# Altium PCB FACE_ENCODER_v1.0.PcbDoc
Units mm, origin at the board's own origin, x right, y up, seen from the top; angles counter-clockwise.
Board outline 49.8 x 49.8 mm, 2 copper layers (Top Layer, Bottom Layer); 17 components, 70 nets, 135 pads, 29 vias.
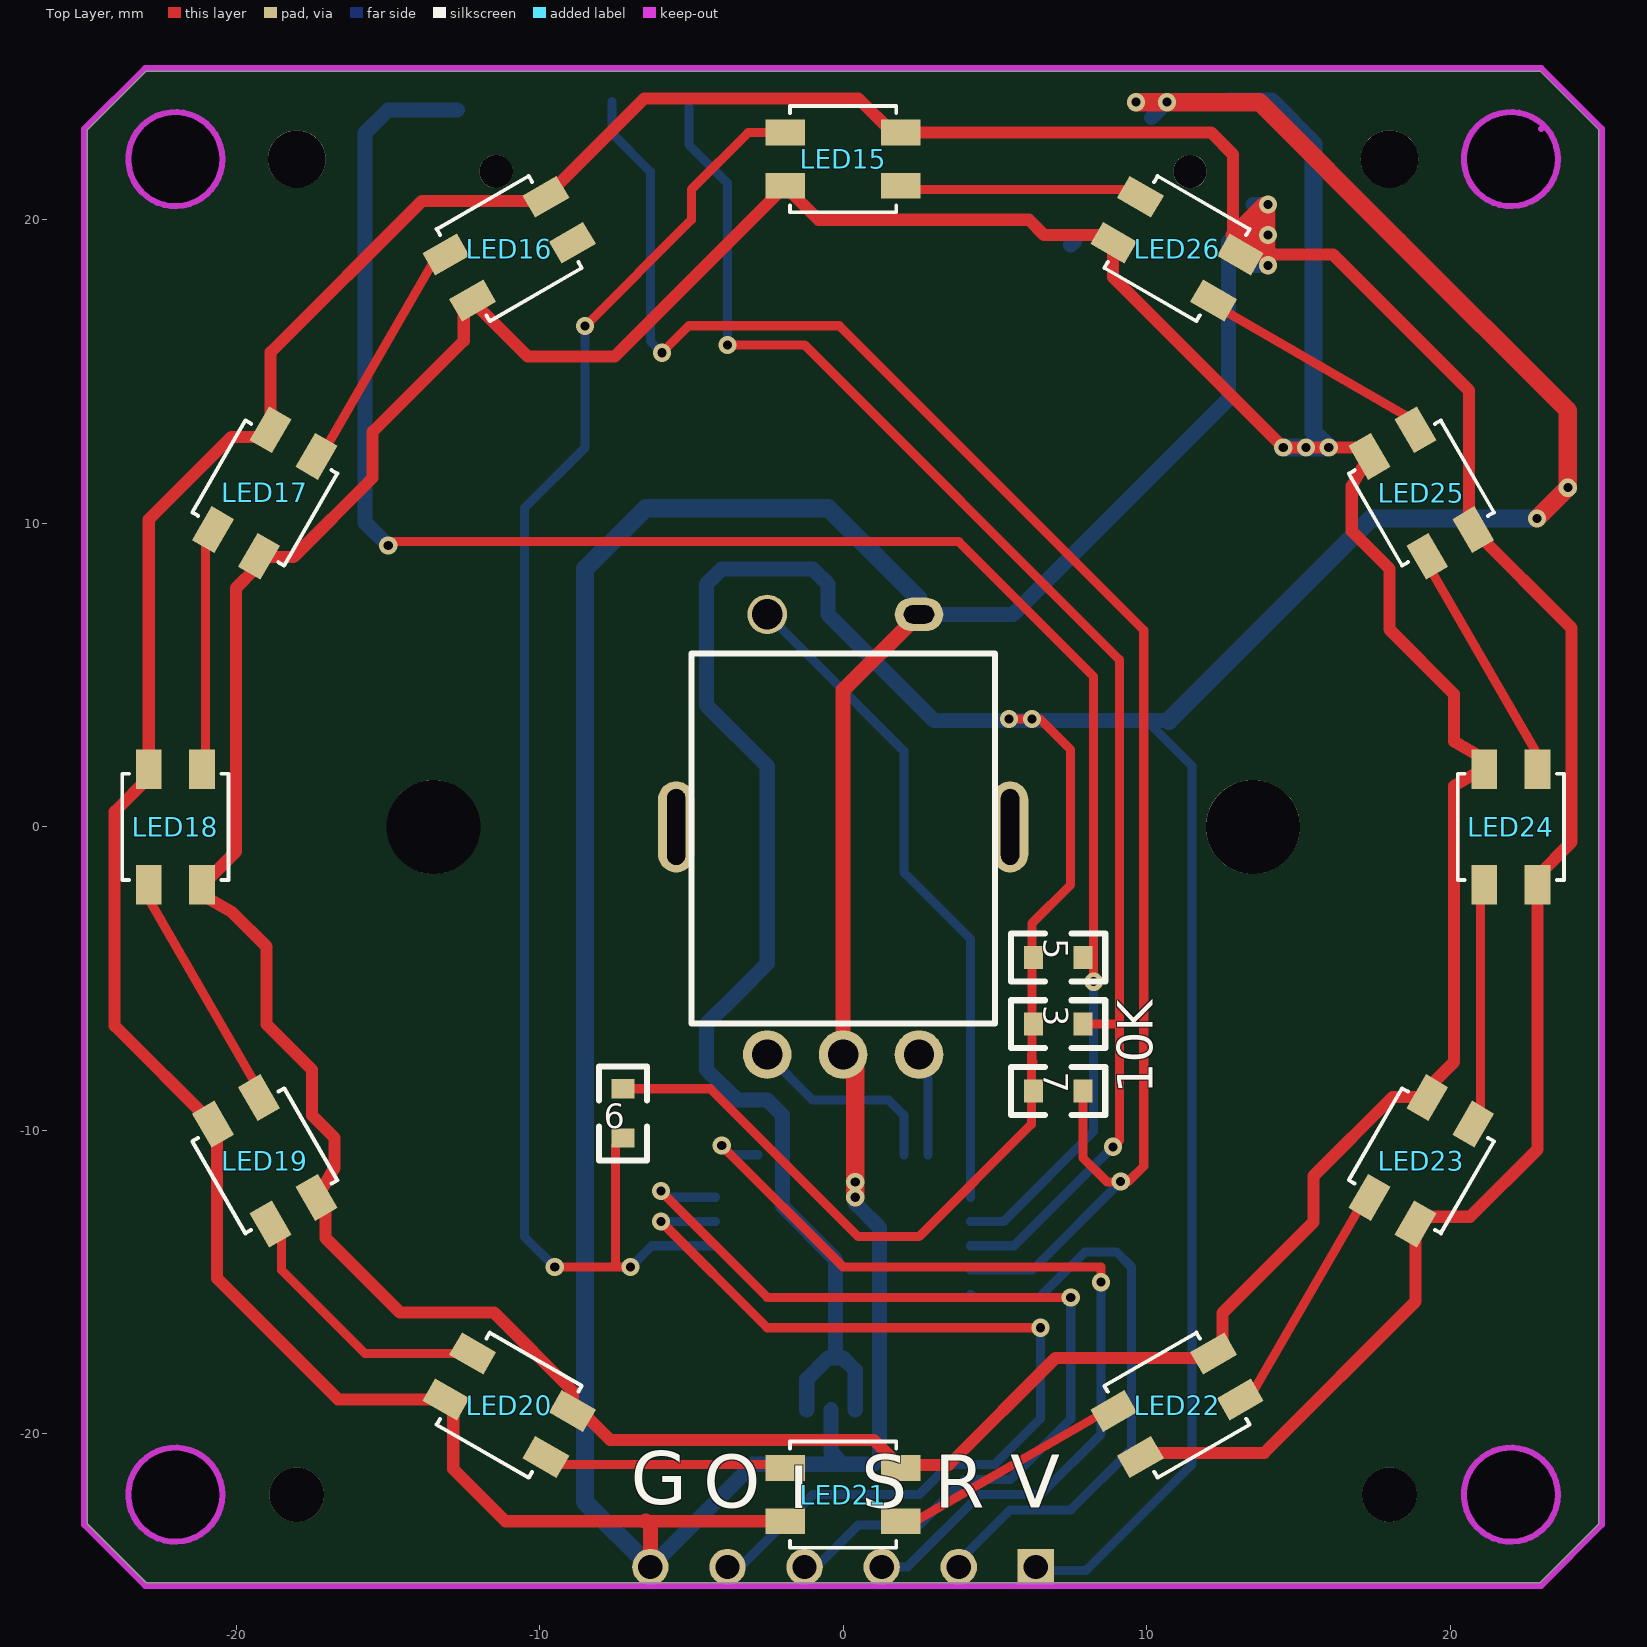
[diagram p0: Top Layer view]
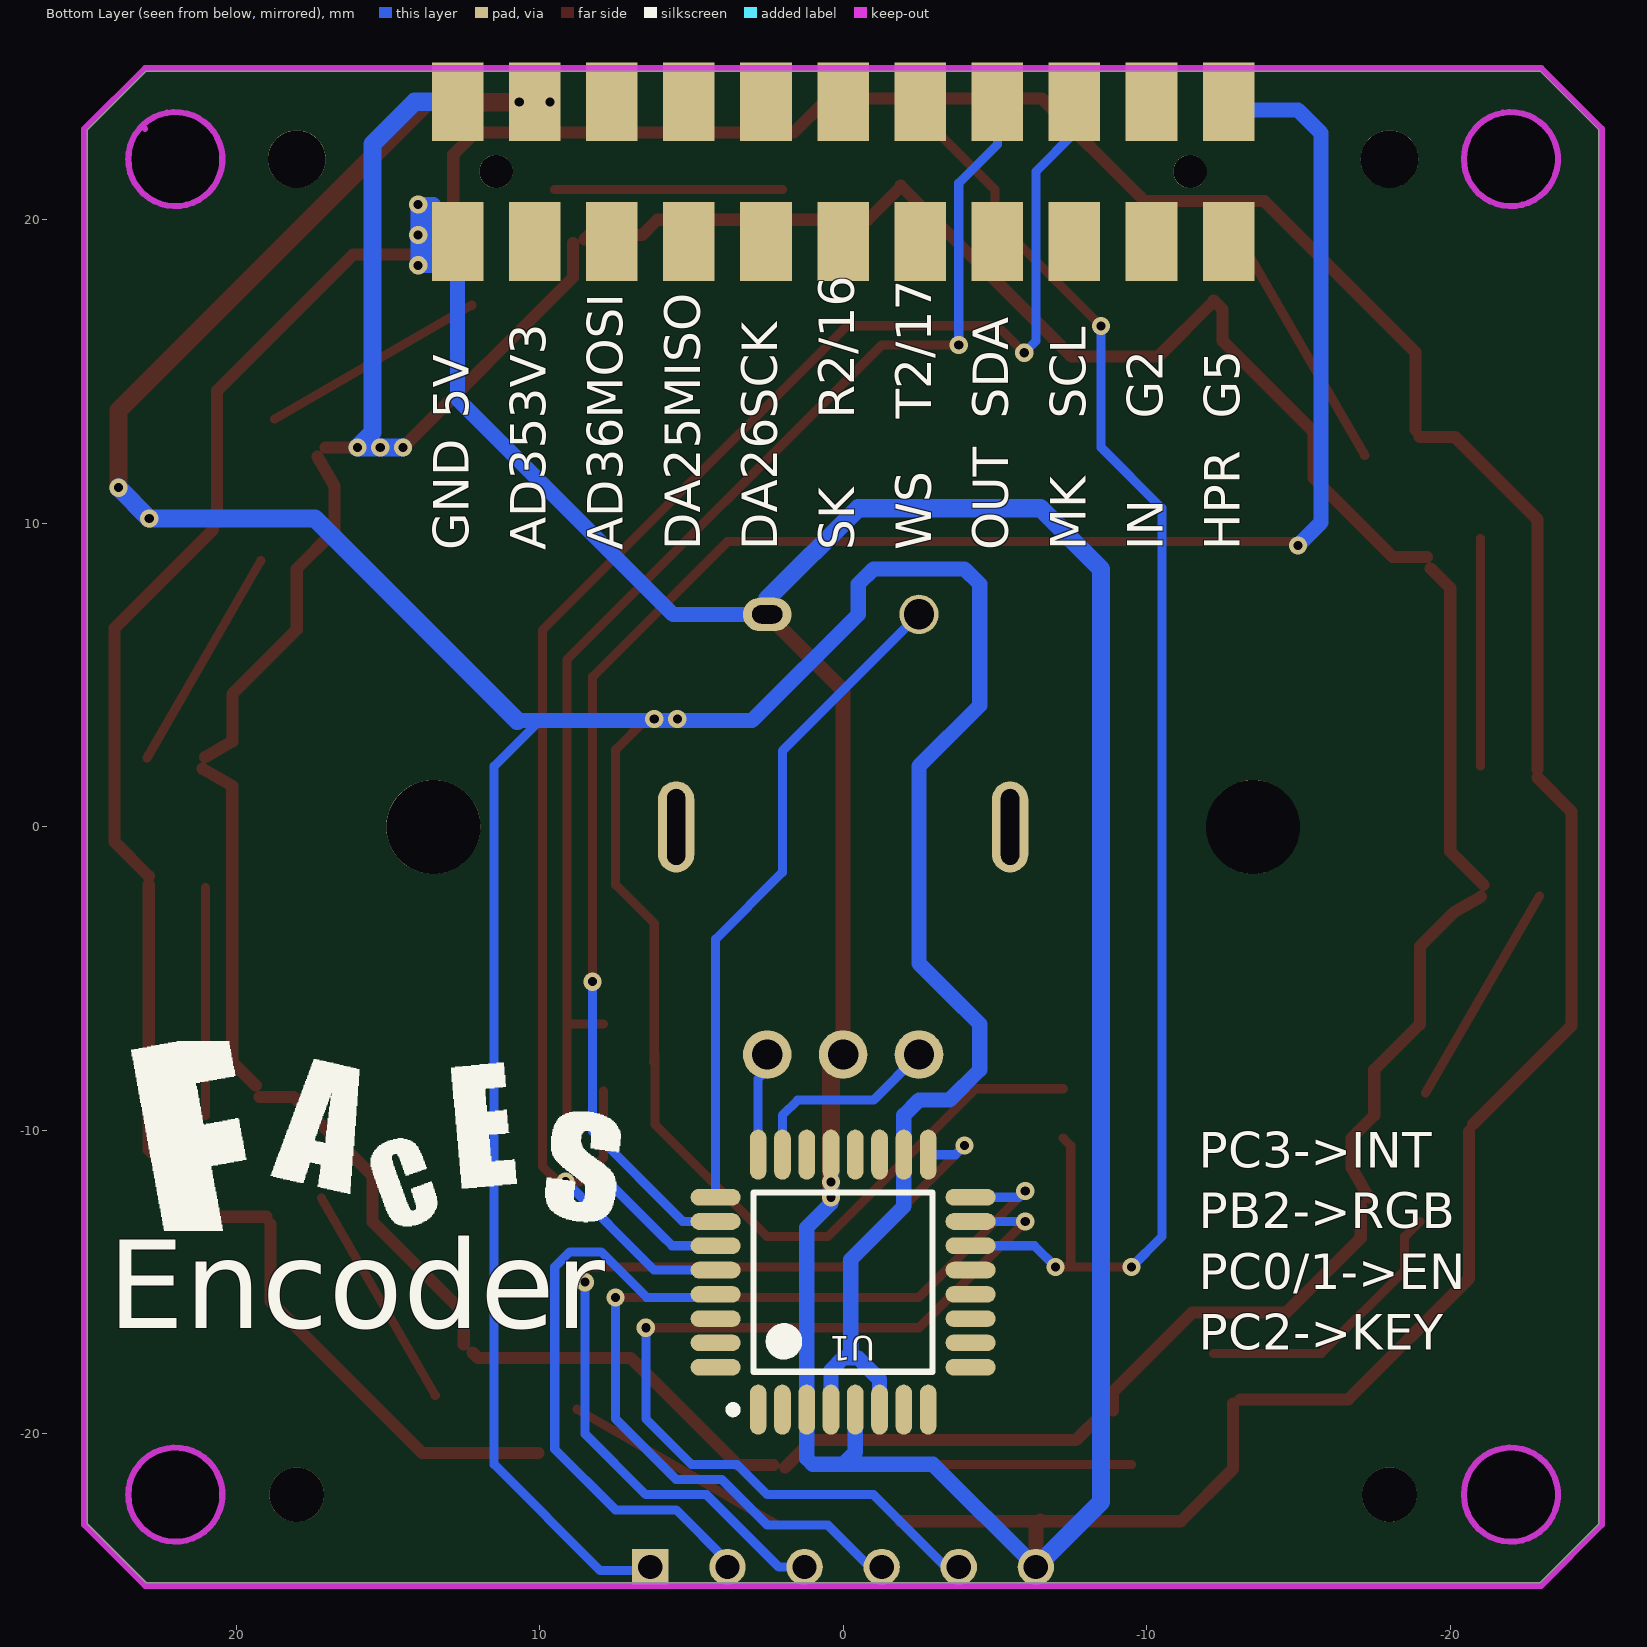
[diagram p1: Bottom Layer view, seen from below]

## Layer stack, top to bottom
Top Layer: signal copper 0.0356
Dielectric: dielectric 0.32, FR-4, Dk 4.8
Bottom Layer: signal copper 0.0356

## Board outline
-22.958,-24.9 -24.9,-22.958 -24.9,22.958 -22.958,24.9 11.5,24.9 cw(c11.5,25) 11.498,24.9 11.5,24.9 22.958,24.9 24.9,22.958 24.9,-22.958 22.958,-24.9

## Design rules (kind name [scope] priority, off if disabled: settings)
Clearance [All] p1: gap=0.152
PlaneConnect [All] p1: planeconnectstyle=Direct reliefexpansion=0.508 reliefentries=4 reliefconductorwidth=0.254 reliefairgap=0.254
PolygonConnect [All] p1: connectstyle=Direct reliefconductorwidth=0.254 reliefentries=4 polygonreliefangle="90 Angle" airgapwidth=0.254
RoutingVias [All] p1: holewidth=0.4 width=0.7 viastyle="Through Hole" minholewidth=0.2 minwidth=0.4 maxholewidth=1 maxwidth=1.2
SilkToSolderMaskClearance SilkscreenOverComponentPads [IsPad] p1: minsilkscreentomaskgap=0.254 clearancetoexposedcopper=TRUE
SolderMaskExpansion [All] p1: expansion=0.102
Width [All] p1: maxlimit=2.54 minlimit=0.152 preferedwidth=0.152 minimp=50.000000 maximp=50.000000 favimp=50.000000
26 further rules are at their usual default settings.

## Classes and differential pairs
component class M5TopDualU: *6 *7 *8 *9 BEEP1 C10

## Components (designator, comment, footprint, x,y, rotation, side; value= is the part's Value field where it differs from the comment)
3 "10K" R0603 7.9,-6.5 r180 top (schematic designator R4)
5 "10K" R0603 7.9,-4.3 r180 top (schematic designator R4)
6 "10K" R0603 -7.253,-8.626 r270 top (schematic designator R4)
7 "10K" R0603 7.9,-8.7 r180 top (schematic designator R4)
LED15 "SK6812" SK6812-3535 0,22 r180 top (schematic designator LED5)
LED16 "SK6812" SK6812-3535 -11,19.053 r210 top (schematic designator LED5)
LED17 "SK6812" SK6812-3535 -19.053,11 r240 top (schematic designator LED5)
LED18 "SK6812" SK6812-3535 -22,0 r270 top (schematic designator LED5)
LED19 "SK6812" SK6812-3535 -19.053,-11 r300 top (schematic designator LED5)
LED20 "SK6812" SK6812-3535 -11,-19.053 r330 top (schematic designator LED5)
LED21 "SK6812" SK6812-3535 0,-22 r0 top (schematic designator LED5)
LED22 "SK6812" SK6812-3535 11,-19.053 r30 top (schematic designator LED5)
LED23 "SK6812" SK6812-3535 19.053,-11 r60 top (schematic designator LED5)
LED24 "SK6812" SK6812-3535 22,0 r90 top (schematic designator LED5)
LED25 "SK6812" SK6812-3535 19.053,11 r120 top (schematic designator LED5)
LED26 "SK6812" SK6812-3535 11,19.053 r150 top (schematic designator LED5)
U1 "ATmega8-16AC" 32A_N 0,-15 r90 bottom

## Footprints (in the part's own frame and the unit in brackets; to place one, negate y for a bottom-side part, rotate by r counter-clockwise, add the part's x,y. Pads: shape width x height; smd on the part's side, far side on the other; paste and mask are expansions set on the pad)
32A_N [mm] "Thin QFP, 32-Leads, Body 7x7mm, Pitch 0.8mm, IPC Medium Density"
  oval 1.65x0.55 smd: 1(-4.2,2.8) 2(-4.2,2) 3(-4.2,1.2) 4(-4.2,0.4) 5(-4.2,-0.4) 6(-4.2,-1.2) 7(-4.2,-2) 8(-4.2,-2.8) 17(4.2,-2.8) 18(4.2,-2) 19(4.2,-1.2) 20(4.2,-0.4) 21(4.2,0.4) 22(4.2,1.2) 23(4.2,2) 24(4.2,2.8)
  oval 0.55x1.65 smd: 9(-2.8,-4.2) 10(-2,-4.2) 11(-1.2,-4.2) 12(-0.4,-4.2) 13(0.4,-4.2) 14(1.2,-4.2) 15(2,-4.2) 16(2.8,-4.2) 25(2.8,4.2) 26(2,4.2) 27(1.2,4.2) 28(0.4,4.2) 29(-0.4,4.2) 30(-1.2,4.2) 31(-2,4.2) 32(-2.8,4.2)
  silkscreen extent -4.32,-2.95 2.95,3.75, body extent -3.5,-3.5 3.5,3.5, height 1.2
R0603 [mil] "电阻0603"
  rect 25x30 smd: 1(0,0) 2(64,0)
  silkscreen extent -29,-31 93,31
SK6812-3535 [mm]
  rect 1.3x0.85 smd: 1(-1.9,0.875) 2(-1.9,-0.875) 3(1.9,-0.875) 4(1.9,0.875)
  silkscreen extent -1.75,-1.75 1.75,1.75, body extent -1.75,-1.75 1.75,1.75, height 0.65

## Part data
3 5 6 7: library part RES2
U1: "8-Bit AVR Microcontroller with 8K Bytes of In-System Programmable Flash Memory"

## Free pads (board coordinates)
  round 3.1 hole 3.1: 0(-22,-22) 0(-22,22) 0(13.5,0) 0(22,-22) 0(22,22)
  round 1.8 hole 1.8: 0(-18,-22) 0(18,-22)
  round 1.9 hole 1.9: 0(-18,22) 0(18,22)
  oval 3x3.1 hole 3.1: 0(-13.5,0)
  round 1.1 hole 1.1: 0(-11.43,21.59) 0(11.43,21.59)
  round 1.2 hole 0.8: 0(-6.35,-24.384) 0(-3.81,-24.384) 0(-1.27,-24.384) 0(1.27,-24.384) 0(3.81,-24.384)
  oval 1.2x3 hole 0.6 slot 2.5 at 90 deg: 0(-5.5,0) 0(5.5,0)
  round 1.6 hole 1: 0(-2.5,-7.5) 0(0,-7.5) 0(2.5,-7.5)
  round 1.3 hole 1: 0(-2.5,7)
  oval 1.6x1.1 hole 0.6 slot 1 at 0 deg: 0(2.5,7)
  rect 1.2x1.2 hole 0.8: 0(6.35,-24.384)
  rect 1.7x2.6 smd far side: 29(-12.7,19.29) 29(-12.7,23.89) 29(-10.16,23.89) 29(-10.16,19.29) 29(-7.62,19.29) 29(-7.62,23.89) 29(-5.08,19.29) 29(-5.08,23.89) 29(-2.54,19.29) 29(-2.54,23.89) 29(0,19.29) 29(0,23.89) 29(2.54,19.29) 29(2.54,23.89) 29(5.08,19.29) 29(5.08,23.89) 29(7.62,19.29) 29(7.62,23.89) 29(10.16,19.29) 29(10.16,23.89) 29(12.7,19.29) 29(12.7,23.89)

## Via types
v1: diameter 0.6, hole 0.3, Top Layer to Bottom Layer, tented both sides, 29 vias

## Nets (pads, with @x,y where several pads share a name; then routed paths per layer and width w, separated by ;. In a path a pad name is that pad's centre, name@x,y a point inside that pad or via, vN(x,y) a via of type N, cw(c..) or ccw(c..) an arc to the next point about the centre after c; other vN are vias at no path point)
8266RST: 
+3.3V: 
+5V: 
A0: 
A1: 
A2: 
A3: 
A4: 
A5: 
AREF: 
BEEP: 
D0/RX: 
D1/TX: 
D2: 
D3: 
D4: 
D5: 
D6: 
D7: 
D+: 
D-: 
ESP_LOAD: 
GND: 
IO8: 
IO9: 
IO10: 
IO11: 
IO12: 
IO13: 
K2: 
KEYA: 
KEYAD: 
KEYC: 
LCDCS: 
LCDLED: 
LCDRS: 
LCDRST: 
LCDSCK: 
LCDSDA: 
MISO: 
MOSI: 
Net*1_6: 
Net*1_16: 
Net*1_17: 
Net*1_24: 
Net*1_33: 
Net*2_2: 
Net*2_3: 
Net*_8: 
Net*_9: 
Net*_10: 
Net*_11: 
Net*_12: 
Net*_13: 
Net*_14: 
NetBEEP1_2: 
NetESP-1_3: 
NetESP-1_15: 
NetESP-1_16: 
NetLED1_1: 
NetQ1_2: 
NetQ2_2: 
NetR2_1: 
NetR3_1: 
NetR9_2: 
NetR10_2: 
RST: 
SCK: 
SS: 
VUSB: 
pads on no net: 3.1 3.2 5.1 5.2 6.1 6.2 7.1 7.2 LED15.1 LED15.2 LED15.3 LED15.4 LED16.1 LED16.2 LED16.3 LED16.4 LED17.1 LED17.2 LED17.3 LED17.4 LED18.1 LED18.2 LED18.3 LED18.4 LED19.1 LED19.2 LED19.3 LED19.4 LED20.1 LED20.2 LED20.3 LED20.4 LED21.1 LED21.2 LED21.3 LED21.4 LED22.1 LED22.2 LED22.3 LED22.4 LED23.1 LED23.2 LED23.3 LED23.4 LED24.1 LED24.2 LED24.3 LED24.4 LED25.1 LED25.2 LED25.3 LED25.4 LED26.1 LED26.2 LED26.3 LED26.4 U1.1 U1.2 U1.3 U1.4 U1.5 U1.6 U1.7 U1.8 U1.9 U1.10 U1.11 U1.12 U1.13 U1.14 U1.15 U1.16 U1.17 U1.18 U1.19 U1.20 U1.21 U1.22 U1.23 U1.24 U1.25 U1.26 U1.27 U1.28 U1.29 U1.30 U1.31 U1.32
copper on no net: | length 1031.2
  Top Layer w0.3: -22.937,-2.273 -19.187,-8.768 ; -21,2 -21,9.5 ; -19,-13 -18.5,-13.5 -18.5,-14.6 -15.755,-17.345 -12.208,-17.345 ; -17.187,12.232 -13.437,18.727 ; v1(-14.986,9.271) -14.859,9.398 3.81,9.398 8.255,4.953 v1(8.255,-5.1) ; -9.5,-21 -2,-21 ; v1(-9.5,-14.5) v1(-7,-14.5) ; v1(-8.5,16.5) -5,20 -5,21 -3.125,22.875 -1.9,22.875 ; -7.5,-14.5 -7.5,-10.499 -7.253,-10.252 ; -7.253,-8.626 -4.374,-8.626 0.5,-13.5 2.5,-13.5 6.2,-9.8 6.2,-7.5 ; v1(-6,-13) -2.5,-16.5 v1(6.5,-16.5) ; v1(-6,-12) -2.5,-15.5 v1(7.5,-15.5) ; v1(-5.969,15.621) -5.08,16.51 -0.127,16.51 0,16.383 9.906,6.477 9.906,-11.176 9.398,-11.684 v1(9.144,-11.684) 9.128,-11.7 8.7,-11.7 7.9,-10.9 7.9,-8.7 ; v1(-4,-10.5) 0,-14.5 8.5,-14.5 v1(8.5,-15) ; v1(-3.81,15.875) -1.27,15.875 9.1,5.505 9.1,-10.331 v1(8.89,-10.541) ; 2,21 9.5,21 ; 2.273,-22.937 8.768,-19.187 ; 3.8,-24 4,-24.2 ; v1(5.461,3.556) v1(6.223,3.556) 6.477,3.556 7.493,2.54 7.493,-1.907 6.223,-3.177 6.223,-7.722 6.248,-7.747 ; 7.9,-6.5 9.1,-6.5 ; 12.232,17.187 18.727,13.437 ; 13.437,-18.727 17.187,-12.232 ; 19.187,8.768 22.937,2.273 ; 21,-9.5 21,-2
  Top Layer w0.4: -22.875,1.625 -24,0.5 -24,-6.552 -20.76,-9.792 ; -22.875,1.9 -22.875,10.125 -20.155,12.845 -18.998,12.845 ; -21.102,-1.913 -20,-0.811 -20,7.148 -20,7.87 -19.352,8.518 ; -21.018,-2.299 -20.121,-2.817 -19,-3.938 -19,-6.5 -17.5,-8 -17.5,-9.5 -16.756,-10.244 -16.756,-11.233 -17.318,-12.208 ; -20.623,-10.03 -20.623,-14.877 -16.64,-18.86 -13.083,-18.86 ; -19.232,8.894 -18.106,8.894 -15.5,11.5 -15.5,13.017 -12.5,16.017 -12.5,17.053 -12.208,17.345 ; -18.86,13.083 -18.86,15.64 -13.877,20.623 -10.03,20.623 ; -17.053,-12.5 -17.053,-13.547 -14.6,-16 -11.5,-16 -8.894,-18.606 -8.894,-19.232 ; -12.845,-18.998 -12.845,-21.155 -11.125,-22.875 -1.9,-22.875 ; -12.208,17.318 -10.39,15.5 -7.525,15.5 -1.9,21.125 ; -9.792,20.76 -6.552,24 0.5,24 1.625,22.875 1.9,22.875 12.125,22.875 12.845,22.155 12.845,18.998 ; -8.518,-19.352 -7.67,-20.2 1.011,-20.2 1.913,-21.102 ; -1.913,21.102 -0.811,20 6.121,20 6.621,19.5 8.37,19.5 8.518,19.352 ; 2.299,-21.018 3.482,-21.018 7,-17.5 12.026,-17.5 12.208,-17.318 ; 8.894,19.232 8.894,18.106 v1(14.5,12.5) 16.017,12.5 17.053,12.5 ; 10.03,-20.623 13.877,-20.623 18.86,-15.64 18.86,-13.083 ; 12.5,-17.053 12.5,-16.017 15.5,-13.017 15.5,-11.5 18.106,-8.894 19.232,-8.894 ; 13.083,18.86 16.14,18.86 20.623,14.377 20.623,10.03 ; 17.318,12.208 16.756,11.233 16.756,9.744 18,8.5 18,6.5 20.121,4.379 20.121,2.817 21.018,2.299 ; 18.998,-12.845 20.655,-12.845 22.875,-10.625 22.875,-1.9 ; 19.352,-8.518 20.127,-7.743 20.127,-6.627 20.127,1.35 21.102,1.913 ; 20.76,9.792 24,6.552 24,-0.5 22.875,-1.625
  Top Layer w0.5: -6.5,-22.875 -6.35,-23.025 -6.35,-24.384 ; 0,-7.5 0,4.5 2.5,7 ; 12.845,19.5 13.845,20.5 v1(14,20.5) ; 13,19 14,20 v1(14,20.5) ; 13.5,19 v1(14,19.5) ; v1(14,18.5) v1(14,20.5)
  Top Layer w0.6: 0,-7.5 0.4,-7.9 v1(0.4,-12.2) ; v1(9.652,23.876) 13.716,23.876 18.288,19.304 23.876,13.716 v1(23.876,11.176) v1(22.86,10.16)
  Bottom Layer w0.3: v1(-9.5,-14.5) -10.5,-13.5 -10.5,10.5 -8.5,12.5 v1(-8.5,16.5) ; -7.62,23.89 -7.62,22.86 -6.35,21.59 -6.35,16.002 v1(-5.969,15.621) ; v1(-7,-14.5) -6.3,-13.8 -4.2,-13.8 ; v1(-6,-13) -4.2,-13 ; v1(-6,-12) -5.8,-12.2 -4.2,-12.2 ; -5.08,23.89 -5.08,22.479 -3.81,21.209 v1(-3.81,15.875) ; v1(-4,-10.5) -3.7,-10.8 -2.8,-10.8 ; -3.81,-24.384 -3.384,-24.384 -1,-22 2.5,-22 3.5,-21 5,-21 6.5,-19.5 v1(6.5,-16.5) ; -2.5,-7.5 -1,-9 1.5,-9 2,-9.5 2,-10.8 ; -2.5,7 2,2.5 2,-1.5 4.2,-3.7 4.2,-12.2 ; -1.27,-24.384 -0.884,-24.384 0.5,-23 2.5,-23 4,-21.5 5.5,-21.5 7.5,-19.5 v1(7.5,-15.5) ; 1.27,-24.384 2.116,-24.384 4.5,-22 6.5,-22 8.5,-20 v1(8.5,-15) ; 2.5,-8 2.8,-8.3 2.8,-10.8 ; 3.81,-24.384 3.81,-24.19 5.5,-22.5 7.5,-22.5 9.5,-20.5 9.5,-14.5 9,-14 7.971,-14 6.471,-15.5 4.3,-15.5 4.2,-15.4 ; 4.2,-14.6 6.228,-14.6 v1(9.144,-11.684) ; 4.2,-13.8 5.631,-13.8 5.969,-13.462 v1(8.89,-10.541) ; 4.2,-13 5.288,-13 8.255,-10.033 v1(8.255,-5.1) ; 6.5,-24.5 8,-24.5 11.5,-21 11.5,2 10,3.5
  Bottom Layer w0.5: v1(-14.986,9.271) -15.748,10.033 -15.748,22.86 -14.986,23.622 -12.7,23.622 ; -6.35,-24.384 -2.966,-21 0,-21 ; -1.2,-19.2 -1.2,-18.2 -0.5,-17.5 0,-17.5 0.4,-17.9 0.4,-19.2 ; -0.4,-19.2 -0.4,-20.6 0,-21 ; -0.25,-17.5 -0.25,-14.25 -2,-12.5 -2,-11 -2,-9.5 -2.5,-9 -3.5,-9 -4.5,-8 -4.5,-6.5 -3.5,-5.5 -2.5,-4.5 -2.5,2 -4.5,4 -4.5,8 -4,8.5 -1,8.5 -0.5,8 -0.5,7 3,3.5 10.739,3.5 ; 0.4,-10.8 0.4,-12.4 0.5,-12.5 1.2,-13.2 1.2,-19.2 1.2,-20.8 1,-21 0,-21 ; 2.5,7 5.6,7 12.7,14.1 12.7,19.29 ; 7.5,19.17 7.62,19.29 ; 10.16,23.368 10.414,23.622 ; 13.5,20.5 v1(14,20.5) ; v1(14,20.5) v1(14,18.5) 13.5,18.5 13.5,20 v1(14,20.5)
  Bottom Layer w0.6: -6.35,-24.384 -8.5,-22.234 -8.5,8.5 -6.5,10.5 -0.5,10.5 2.5,7.5 2.5,7 ; 10.739,3.5 17.399,10.16 v1(22.86,10.16) v1(23.876,11.176) ; 12.7,23.89 14.11,23.89 15.5,22.5 15.5,13 v1(16,12.5) v1(14.5,12.5)
  other v1: 0.4,-11.7 15.25,12.5 10.668,23.876

## Keep-outs
Keep-Out Layer:
  circle w0.2: c22,-22 r1.55
  circle w0.2: c-22,-22 r1.55
  circle w0.2: c22,22 r1.55
  circle w0.2: c-22,22 r1.55
  lines w0.2: -25,-7.8 -25,-18.2 ; -7.8,-25 -18.2,-25 ; -25,-18.2 -25,-18.2 ; -23,25 11.5,25 ; -23,25 -23,25 ; -23,25 -25,23 -25,-23 -23,-25 23,-25 25,-23 25,23 23,25 16.5,25 11.5,25 ; -18.2,-25 -18.2,-25 ; 11.5,25 11.5,25 ; 23,23 23,23

## Silkscreen, mask and mechanical layers (free items; w line width, h text height)
Top Overlay:
  lines w0.2: -5,-6.477 -5,5.715 5,5.715 5,-6.477 -5,-6.477
  text "10K" at 10.6,-8.8 h2 r90
  text "G" at -7,-22.9 h3
  text "O" at -4.6,-23 h3
  text "I" at -1.8,-23 h3
  text "S" at 0.6,-23 h3
  text "R" at 3,-23 h3
  text "V" at 5.5,-23 h3
Bottom Overlay:
  drawing of 1074 lines, arcs and shapes, not listed
  text "G5" at -13.462,13.446 h2 r270
  text "G2" at -10.922,13.446 h2 r270
  text "SCL" at -8.382,13.446 h2 r270
  text "SDA" at -5.842,13.446 h2 r270
  text "T2/17" at -3.302,13.446 h2 r270
  text "R2/16" at -0.762,13.446 h2 r270
  text "SCK" at 1.778,13.446 h2 r270
  text "MISO" at 4.318,13.446 h2 r270
  text "MOSI" at 6.858,13.446 h2 r270
  text "3V3" at 9.398,13.446 h2 r270
  text "5V" at 11.938,13.446 h2 r270
  text "HPR" at -13.462,9.12 h2 r270
  text "IN" at -10.922,9.12 h2 r270
  text "MK" at -8.382,9.12 h2 r270
  text "OUT" at -5.842,9.12 h2 r270
  text "WS" at -3.302,9.12 h2 r270
  text "SK" at -0.762,9.12 h2 r270
  text "DA26" at 1.778,9.12 h2 r270
  text "DA25" at 4.318,9.12 h2 r270
  text "AD36" at 6.858,9.12 h2 r270
  text "AD35" at 9.398,9.12 h2 r270
  text "GND" at 11.938,9.12 h2 r270
  text "PC3->INT" at -11.71,-11.62 h2
  text "PB2->RGB" at -11.71,-13.62 h2
  text "PC0/1->EN" at -11.71,-15.62 h2
  text "Encoder" at 24.226,-17.476 h5
  text "PC2->KEY" at -11.71,-17.62 h2